# Altium PCB PCB_18_R2.PcbDoc (part 3 of 3)
Units mm, origin at the board's own origin, x right, y up, seen from the top; angles counter-clockwise.
Board outline 255 x 215.3 mm, 2 copper layers (Top Layer, Bottom Layer), stack 1.071 mm thick; 236 components, 0 nets, 1421 pads, 588 vias.
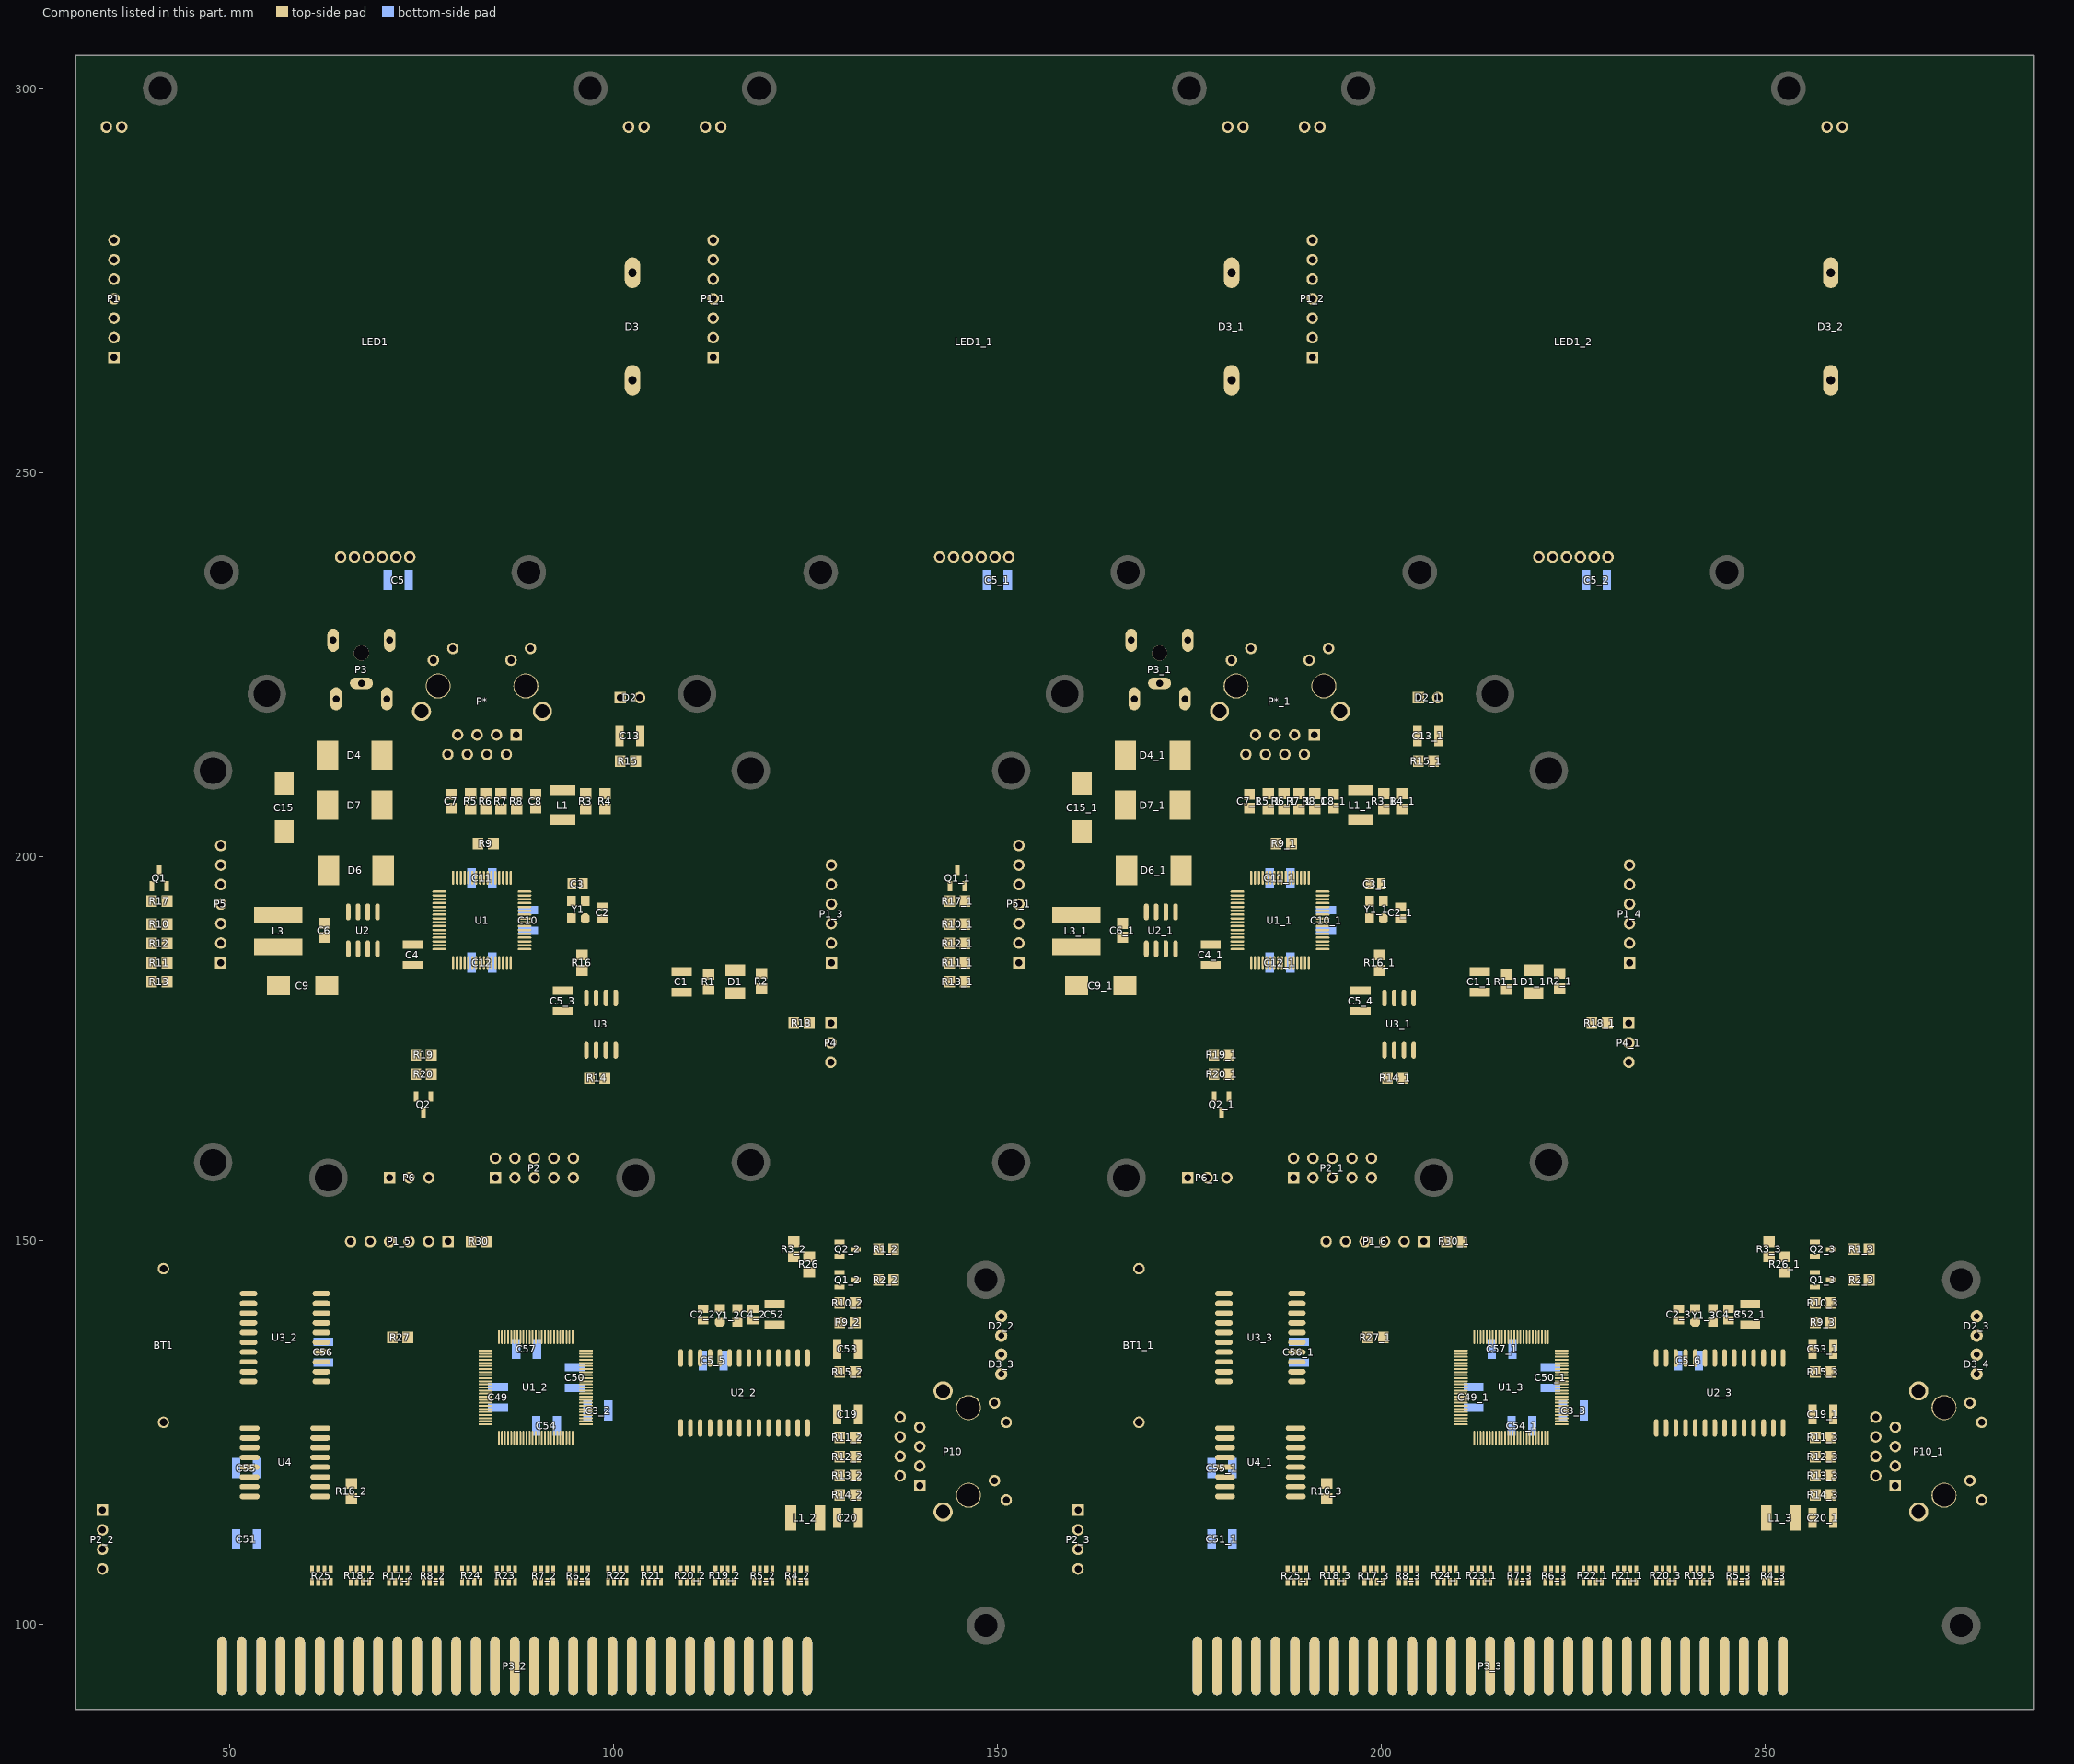
[diagram p3: the components of this part, seen from the top]

## Via types
v1: diameter 1.2, hole 0.6, Top Layer to Bottom Layer, 588 vias

## Nets (pads, with @x,y where several pads share a name; then routed paths per layer and width w, separated by ;. In a path a pad name is that pad's centre, name@x,y a point inside that pad or via, vN(x,y) a via of type N, cw(c..) or ccw(c..) an arc to the next point about the centre after c; other vN are vias at no path point) (continued)
copper on no net: (continued)
  Bottom Layer w0.254: 35,265 42,265 64.5,242.5 64.5,239 ; 35,270.08 42.12,270.08 68.1,244.1 68.1,239 ; 35,275.1 42.9,275.1 71.7,246.3 71.7,239 ; v1(45.9,186.2) 48.9,186.2 ; v1(45.9,191.28) 48.9,191.28 ; 56.68,94.64 56.7,94.66 56.7,100.6 60,103.9 v1(62.5,103.9) ; v1(57.5,108.4) 58.5,109.4 63.025,109.4 65.7,112.075 75.675,112.075 v1(77,113.4) ; v1(57.5,110.4) 62.979,110.4 65.229,112.65 73.25,112.65 v1(76,115.4) ; 59.22,94.64 59.22,101.32 60.3,102.4 v1(63.5,102.4) ; v1(59.5,108.4) 72.5,108.4 v1@73.8,109.7 ; v1(59.499,112.401) 63.625,116.525 71,116.525 76.375,121.9 v1(77,121.9) ; 61.74,94.68 61.74,99.14 65,102.4 v1(65,103.9) ; v1(62,111.4) 65.975,115.375 72,115.375 76.525,119.9 v1(77,119.9) ; v1(62,113.4) 64.575,115.975 71.5,115.975 76.425,120.9 v1(78.5,120.9) ; 64.28,94.68 64.28,100.68 v1(66,102.4) ; v1(66.498,114.398) 72,114.398 76.502,118.9 78.5,118.9 79,118.4 79,115.1 86.7,107.4 97.3,107.4 98,108.1 98,112.9 v1(95.25,115.65) v1@95.5,115.4 ; v1(66.5,110.9) 76.5,110.9 77.5,109.9 78.5,109.9 v1(79,109.4) ; 66.82,94.68 66.82,99.72 69.5,102.4 v1(70.5,102.4) ; v1@67.5,141.438 72.938,141.438 73.512,142.012 73.512,144.812 77.1,148.4 v1(89.5,148.4) ; 68.34,149.9 70.426,147.814 70.426,144.474 v1(72.5,142.4) ; 69.5,94.82 69.36,94.68 69.4,94.72 69.4,99.4 71.5,101.5 v1(71.5,103.9) ; 70.88,149.9 70.88,146.02 v1(72.6,144.4) ; 71.9,94.68 72,94.78 ; v1(71.9,175.7) 71.9,190.45 v1(73.4,191.95) ; 71.92,94.64 71.92,101.82 v1(72.5,102.4) ; v1@73.4,193.7 73.4,197.165 71.203,199.362 71.203,202.024 74.479,205.3 92.34,205.3 106.3,205.3 125.4,186.2 128.4,186.2 ; v1(73.5,103.9) 73.5,100.9 74.44,99.96 74.44,94.68 ; v1(74.4,200.7) 76.746,198.354 76.746,167.996 82.128,162.614 87.856,162.614 89.73,160.74 ; v1(75,102.4) 75,101.4 75.5,100.9 76.5,100.9 77,100.4 77,94.7 76.98,94.68 ; v1(75.4,202.2) 74.589,202.2 73.473,201.084 73.473,200.316 74.016,199.773 76.292,197.497 76.292,167.808 81.94,162.16 85.77,162.16 87.19,160.74 ; v1(76,103.9) 76,101.8 76.4,101.4 79,101.4 79.52,100.88 79.52,94.68 ; v1(76,127.5) 77,128.5 v1(77,131.4) ; v1(76.4,200.7) 76.4,202.7 75.9,203.2 74.947,203.2 73.019,201.272 73.019,200.128 73.828,199.319 75.838,197.309 75.838,167.62 75.838,167.484 82.522,160.8 84.9,160.8 ; v1(77,102.4) 80.8,102.4 82.1,101.1 82.1,94.72 82.06,94.68 ; v1(77,117.9) 77,115.764 87.064,105.7 113.8,105.7 116,107.9 v1(116,109.4) ; v1(77,135.9) 79.6,133.3 79.6,123.32 79.63,123.29 79.63,115.06 79.916,114.774 83.478,111.212 87.684,111.212 89.496,109.4 v1(90.5,109.4) ; v1(77,141.4) 77,139.995 78.838,138.157 80.538,136.457 80.538,115.436 83.587,112.387 92.513,112.387 v1(94,110.9) ; v1(77,143.4) 79,143.4 79.746,142.654 79.746,138.533 81.446,136.833 81.446,115.812 83.858,113.4 94.5,113.4 96,111.9 v1(96,110.9) ; v1(77.4,202.2) 77.4,203.3 76.88,203.82 74.925,203.82 72.565,201.46 72.565,199.94 73.64,198.865 75.384,197.121 75.384,167.296 84.48,158.2 84.65,158.2 ; v1(78,103.9) 82.8,103.9 84.7,102 84.7,94.78 84.6,94.68 ; v1(78,116.4) 78,115.406 87.068,106.338 113.438,106.338 115,107.9 v1(115,110.9) ; v1(78.4,200.7) 78.4,203.3 77.426,204.274 74.737,204.274 72.111,201.648 72.111,199.752 73.452,198.411 74.93,196.933 74.93,167.108 74.93,165.412 83.702,156.64 86.64,156.64 87.19,157.19 87.19,158.2 ; v1(78.5,136.9) 80.084,135.316 80.084,115.248 83.532,111.8 88.6,111.8 v1(89.5,110.9) ; v1(78.5,142.4) 78.5,139.137 80.992,136.645 80.992,115.624 83.716,112.9 93.5,112.9 95,111.4 v1(95,109.4) ; v1(78.5,144.4) 79.4,144.4 80.2,143.6 80.2,138.721 81.9,137.021 81.9,116 83.996,113.904 94.996,113.904 97,111.9 v1(97,109.4) ; 79.115,227.102 85.161,227.102 86.685,225.578 ; v1(79.4,202.2) 79.4,203.3 77.972,204.728 77.557,204.728 77.143,204.728 74.549,204.728 71.657,201.836 71.657,199.564 73.264,197.957 74.476,196.745 74.476,165.224 83.514,156.186 88.986,156.186 89.73,156.93 89.73,158.2 ; v1(81.4,181.7) 82.754,183.054 92.412,183.054 95.86,186.502 95.86,203.66 v1(96.4,204.2) ; 81.55,196.05 81.55,197.2 ; v1(83.4,181.7) 84.3,182.6 92.6,182.6 96.314,186.314 96.314,201.614 v1(98.9,204.2) ; v1(84.5,143.4) 85.946,141.954 93.646,141.954 94.473,141.127 94.486,141.127 94.537,141.076 98.524,141.076 102,137.6 v1(102,136.4) ; v1(85,149.9) 90,149.9 v1(91.5,148.4) ; v1(85.5,144.9) 85.5,143.025 86.117,142.408 93.834,142.408 94.661,141.581 94.674,141.581 94.725,141.53 98.712,141.53 102.842,137.4 v1(103.5,137.4) ; v1(85.9,194.7) v1(92.393,201.193) ; v1(86.5,143.4) 86.5,145.4 87,145.9 88.2,145.9 90.784,143.316 94.21,143.316 95.037,142.489 95.051,142.489 95.102,142.438 99.963,142.438 100.5,142.975 v1(100.5,144.9) ; 87.14,94.68 87.14,101.04 88.5,102.4 v1(89.5,102.4) ; v1(87.5,144.9) 89.538,142.862 94.022,142.862 94.849,142.035 94.863,142.035 94.914,141.984 98.9,141.984 101.984,138.9 104.2,138.9 104.8,138.3 104.8,136 104.2,135.4 v1(103.5,135.4) ; 87.55,190.35 88.9,190.35 ; 89.5,94.86 89.68,94.68 89.6,94.76 89.6,100.2 90.5,101.1 v1(90.5,103.9) ; v1(90.4,185.2) 94.4,189.2 v1(94.4,202.6) ; v1(91.5,102.4) 91.5,100.9 92.22,100.18 92.22,94.68 ; 92.27,158.2 93.4,159.33 93.4,180.4 99,186 99,199.8 v1(99.9,200.7) ; 92.27,160.74 92.27,180.155 98.419,186.304 98.419,200.181 v1@97.9,200.7 ; v1(92.5,103.9) 92.5,100.9 93,100.4 94.1,100.4 94.76,99.74 94.76,94.68 ; v1(94,102.4) 94,101.5 94.6,100.9 96.6,100.9 97.3,100.2 97.3,94.68 ; v1(94.9,171.2) 94.9,177.635 v1(96.499,179.234) ; v1(95,103.9) 95,101.9 95.5,101.4 99.3,101.4 99.84,100.86 99.84,94.68 ; v1(95.5,143.4) 95.5,145.9 97.3,147.7 106.2,147.7 v1(107,146.9) v1@106.673,147.227 ; v1(96,102.4) 101.4,102.4 102.5,101.3 102.5,94.8 102.38,94.68 ; v1(97,103.9) 103.5,103.9 105,102.4 105,94.76 104.92,94.68 ; v1(97.474,143.4) 97.5,143.4 97.5,145.561 98.709,146.77 103.13,146.77 108.186,141.714 108.186,118.586 105.604,116.004 105.604,114.796 106.5,113.9 v1(106.5,109.4) ; v1(98.5,144.9) 98.5,145.107 99.709,146.316 102.942,146.316 107.732,141.526 107.732,118.774 105,116.042 105,111.4 v1(105.5,110.9) ; v1(99.5,110.9) 99.5,114.394 105.008,119.902 105.008,132.692 104.3,133.4 v1(103.5,133.4) ; v1(99.5,143.4) 99.5,145.26 100.102,145.862 102.754,145.862 107.278,141.338 107.278,118.962 104.5,116.184 v1(104.5,109.4) ; v1(100.5,109.4) 100.5,114.752 105.462,119.714 105.462,133.438 104.5,134.4 v1(102,134.4) ; v1(101.5,110.9) 101.5,115.11 105.916,119.526 105.916,138.784 104.3,140.4 v1(102,140.4) ; v1(102,132.4) 104,132.4 104.554,131.846 104.554,123.688 ; v1(102,142.4) 105.3,142.4 106.824,140.876 106.824,119.15 103.5,115.826 v1(103.5,110.9) ; v1(102.5,109.4) 102.5,115.468 106.37,119.338 106.37,139.83 104.8,141.4 v1(103.5,141.4) ; 103.44,220.7 103.44,209.16 121.4,191.2 123.86,188.74 128.4,188.74 ; v1(103.5,131.4) 104.1,130.8 104.1,123.876 ; v1(106.7,115.3) 106.819,115.3 108.764,117.245 ccw(c102.587,123.423) v1(111.323,123.423) ; 107.46,94.68 107.46,100.56 108.6,101.7 117.2,101.7 118,102.5 v1(118,103.9) ; v1(108,145.4) 106.898,145.4 105.071,147.227 98.027,147.227 96.5,145.7 v1@96.5,145.132 ; v1@109.6,128.3 109.6,128.4 v1@109.6,128.7 ; 110,94.68 110,100.1 111.1,101.2 117.8,101.2 v1(119,102.4) ; v1(110.5,115.9) 110.5,115.54 113,113.04 v1(113,110.9) ; v1(112.5,115.9) 114,114.4 v1(114,109.4) ; 112.54,94.68 112.54,99.84 113.4,100.7 119,100.7 120,101.7 v1(120,103.9) ; 113,265 120,265 142.5,242.5 142.5,239 ; 113,270.08 120.12,270.08 146.1,244.1 146.1,239 ; 113,275.1 120.9,275.1 149.7,246.3 149.7,239 ; v1(114,121.9) 116.016,119.884 117.984,119.884 v1(119,120.9) ; 115.08,94.68 115.08,99.58 115.7,100.2 119.51,100.2 121,101.69 v1(121,102.4) ; v1@115.1,123.4 115.1,122.3 v1(116.5,120.9) ; 117.62,94.68 117.62,99.32 118.046,99.746 119.846,99.746 122,101.9 v1(122,103.9) ; 120.16,98.46 120.16,94.68 120.16,99.06 123,101.9 v1(123,102.4) ; 122.7,94.68 122.7,100 124.013,101.313 v1@124.013,103.8 ; 125.24,94.68 v1(125.24,102.4) ; v1@127.833,119.266 127.833,119.733 133.843,125.743 139.898,125.743 ; 132.88,114.574 133,114.694 ; v1(149.8,186.2) 152.8,186.2 ; v1(149.8,191.28) 152.8,191.28 ; 150.5,135.17 149.23,135.17 148.5,135.9 ; 150.5,140.17 148.5,138.17 148.5,135.9 ; v1(175.8,175.7) 175.8,190.45 v1(177.3,191.95) ; v1(177.299,193.699) 177.3,197.165 175.103,199.362 175.103,202.024 178.379,205.3 196.24,205.3 210.2,205.3 229.3,186.2 232.3,186.2 ; v1(178.3,200.7) 180.646,198.354 180.646,167.996 186.028,162.614 191.756,162.614 193.63,160.74 ; v1(179.3,202.2) 178.489,202.2 177.373,201.084 177.373,200.316 177.916,199.773 180.192,197.497 180.192,167.808 185.84,162.16 189.67,162.16 191.09,160.74 ; v1(180.3,200.7) 180.3,202.7 179.8,203.2 178.847,203.2 176.919,201.272 176.919,200.128 177.728,199.319 179.738,197.309 179.738,167.62 179.738,167.484 186.422,160.8 188.8,160.8 ; v1(181.3,202.2) 181.3,203.3 180.78,203.82 178.825,203.82 176.465,201.46 176.465,199.94 177.54,198.865 179.284,197.121 179.284,167.296 188.38,158.2 188.55,158.2 ; v1(182.3,200.7) 182.3,203.3 181.326,204.274 178.637,204.274 176.011,201.648 176.011,199.752 177.352,198.411 178.83,196.933 178.83,167.108 178.83,165.412 187.602,156.64 190.54,156.64 191.09,157.19 191.09,158.2 ; 183.015,227.102 189.061,227.102 190.585,225.578 ; v1(183.3,202.2) 183.3,203.3 181.872,204.728 181.457,204.728 181.043,204.728 178.449,204.728 175.557,201.836 175.557,199.564 177.164,197.957 178.376,196.745 178.376,165.224 187.414,156.186 192.886,156.186 193.63,156.93 193.63,158.2 ; 183.68,94.64 183.7,94.66 183.7,100.6 187,103.9 v1(189.5,103.9) ; v1(184.5,108.4) 185.5,109.4 190.025,109.4 192.7,112.075 202.675,112.075 v1(204,113.4) ; v1(184.5,110.4) 189.979,110.4 192.229,112.65 200.25,112.65 v1(203,115.4) ; v1(185.3,181.7) 186.654,183.054 196.312,183.054 199.76,186.502 199.76,203.66 v1(200.3,204.2) ; 185.45,196.05 185.45,197.2 ; 186.22,94.64 186.22,101.32 187.3,102.4 v1(190.5,102.4) ; v1(186.5,108.4) 199.5,108.4 v1@200.8,109.7 ; v1(186.499,112.401) 190.625,116.525 198,116.525 203.375,121.9 v1(204,121.9) ; v1(187.3,181.7) 188.2,182.6 196.5,182.6 200.214,186.314 200.214,201.614 v1(202.8,204.2) ; 188.74,94.68 188.74,99.14 192,102.4 v1(192,103.9) ; v1(189,111.4) 192.975,115.375 199,115.375 203.525,119.9 v1(204,119.9) ; v1(189,113.4) 191.575,115.975 198.5,115.975 203.425,120.9 v1(205.5,120.9) ; v1(189.8,194.7) v1(196.293,201.193) ; 191,265 198,265 220.5,242.5 220.5,239 ; 191,270.08 198.12,270.08 224.1,244.1 224.1,239 ; 191,275.1 198.9,275.1 227.7,246.3 227.7,239 ; 191.28,94.68 191.28,100.68 v1(193,102.4) ; 191.45,190.35 192.8,190.35 ; v1(193.498,114.398) 199,114.398 203.502,118.9 205.5,118.9 206,118.4 206,115.1 213.7,107.4 224.3,107.4 225,108.1 225,112.9 v1(222.25,115.65) v1@222.5,115.4 ; v1(193.5,110.9) 203.5,110.9 204.5,109.9 205.5,109.9 v1(206,109.4) ; 193.82,94.68 193.82,99.72 196.5,102.4 v1(197.5,102.4) ; v1(194.3,185.2) 198.3,189.2 v1(198.3,202.6) ; v1@194.5,141.438 199.938,141.438 200.512,142.012 200.512,144.812 204.1,148.4 v1(216.5,148.4) ; 195.34,149.9 197.426,147.814 197.426,144.474 v1(199.5,142.4) ; 196.17,158.2 197.3,159.33 197.3,180.4 202.9,186 202.9,199.8 v1(203.8,200.7) ; 196.17,160.74 196.17,180.155 202.319,186.304 202.319,200.181 v1@201.8,200.7 ; 196.5,94.82 196.36,94.68 196.4,94.72 196.4,99.4 198.5,101.5 v1(198.5,103.9) ; 197.88,149.9 197.88,146.02 v1(199.6,144.4) ; v1(198.8,171.2) 198.8,177.635 v1(200.399,179.234) ; 198.9,94.68 199,94.78 ; 198.92,94.64 198.92,101.82 v1(199.5,102.4) ; v1(200.5,103.9) 200.5,100.9 201.44,99.96 201.44,94.68 ; v1(202,102.4) 202,101.4 202.5,100.9 203.5,100.9 204,100.4 204,94.7 203.98,94.68 ; v1(203,103.9) 203,101.8 203.4,101.4 206,101.4 206.52,100.88 206.52,94.68 ; v1(203,127.5) 204,128.5 v1(204,131.4) ; v1(204,102.4) 207.8,102.4 209.1,101.1 209.1,94.72 209.06,94.68 ; v1(204,117.9) 204,115.764 214.064,105.7 240.8,105.7 243,107.9 v1(243,109.4) ; v1(204,135.9) 206.6,133.3 206.6,123.32 206.63,123.29 206.63,115.06 206.916,114.774 210.478,111.212 214.684,111.212 216.496,109.4 v1(217.5,109.4) ; v1(204,141.4) 204,139.995 205.838,138.157 207.538,136.457 207.538,115.436 210.587,112.387 219.513,112.387 v1(221,110.9) ; v1(204,143.4) 206,143.4 206.746,142.654 206.746,138.533 208.446,136.833 208.446,115.812 210.858,113.4 221.5,113.4 223,111.9 v1(223,110.9) ; v1(205,103.9) 209.8,103.9 211.7,102 211.7,94.78 211.6,94.68 ; v1(205,116.4) 205,115.406 214.068,106.338 240.438,106.338 242,107.9 v1(242,110.9) ; v1(205.5,136.9) 207.084,135.316 207.084,115.248 210.532,111.8 215.6,111.8 v1(216.5,110.9) ; v1(205.5,142.4) 205.5,139.137 207.992,136.645 207.992,115.624 210.716,112.9 220.5,112.9 222,111.4 v1(222,109.4) ; v1(205.5,144.4) 206.4,144.4 207.2,143.6 207.2,138.721 208.9,137.021 208.9,116 210.996,113.904 221.996,113.904 224,111.9 v1(224,109.4) ; 207.34,220.7 207.34,209.16 225.3,191.2 227.76,188.74 232.3,188.74 ; v1(211.5,143.4) 212.946,141.954 220.646,141.954 221.473,141.127 221.486,141.127 221.537,141.076 225.524,141.076 229,137.6 v1(229,136.4) ; v1(212,149.9) 217,149.9 v1(218.5,148.4) ; v1(212.5,144.9) 212.5,143.025 213.117,142.408 220.834,142.408 221.661,141.581 221.674,141.581 221.725,141.53 225.712,141.53 229.842,137.4 v1(230.5,137.4) ; v1(213.5,143.4) 213.5,145.4 214,145.9 215.2,145.9 217.784,143.316 221.21,143.316 222.037,142.489 222.051,142.489 222.102,142.438 226.963,142.438 227.5,142.975 v1(227.5,144.9) ; 214.14,94.68 214.14,101.04 215.5,102.4 v1(216.5,102.4) ; v1(214.5,144.9) 216.538,142.862 221.022,142.862 221.849,142.035 221.863,142.035 221.914,141.984 225.9,141.984 228.984,138.9 231.2,138.9 231.8,138.3 231.8,136 231.2,135.4 v1(230.5,135.4) ; 216.5,94.86 216.68,94.68 216.6,94.76 216.6,100.2 217.5,101.1 v1(217.5,103.9) ; v1(218.5,102.4) 218.5,100.9 219.22,100.18 219.22,94.68 ; v1(219.5,103.9) 219.5,100.9 220,100.4 221.1,100.4 221.76,99.74 221.76,94.68 ; v1(221,102.4) 221,101.5 221.6,100.9 223.6,100.9 224.3,100.2 224.3,94.68 ; v1(222,103.9) 222,101.9 222.5,101.4 226.3,101.4 226.84,100.86 226.84,94.68 ; v1(222.5,143.4) 222.5,145.9 224.3,147.7 233.2,147.7 v1(234,146.9) v1@233.673,147.227 ; v1(223,102.4) 228.4,102.4 229.5,101.3 229.5,94.8 229.38,94.68 ; v1(224,103.9) 230.5,103.9 232,102.4 232,94.76 231.92,94.68 ; v1(224.474,143.4) 224.5,143.4 224.5,145.561 225.709,146.77 230.13,146.77 235.186,141.714 235.186,118.586 232.604,116.004 232.604,114.796 233.5,113.9 v1(233.5,109.4) ; v1(225.5,144.9) 225.5,145.107 226.709,146.316 229.942,146.316 234.732,141.526 234.732,118.774 232,116.042 232,111.4 v1(232.5,110.9) ; v1(226.5,110.9) 226.5,114.394 232.008,119.902 232.008,132.692 231.3,133.4 v1(230.5,133.4) ; v1(226.5,143.4) 226.5,145.26 227.102,145.862 229.754,145.862 234.278,141.338 234.278,118.962 231.5,116.184 v1(231.5,109.4) ; v1(227.5,109.4) 227.5,114.752 232.462,119.714 232.462,133.438 231.5,134.4 v1(229,134.4) ; v1(228.5,110.9) 228.5,115.11 232.916,119.526 232.916,138.784 231.3,140.4 v1(229,140.4) ; v1(229,132.4) 231,132.4 231.554,131.846 231.554,123.688 ; v1(229,142.4) 232.3,142.4 233.824,140.876 233.824,119.15 230.5,115.826 v1(230.5,110.9) ; v1(229.5,109.4) 229.5,115.468 233.37,119.338 233.37,139.83 231.8,141.4 v1(230.5,141.4) ; v1(230.5,131.4) 231.1,130.8 231.1,123.876 ; v1(233.7,115.3) 233.819,115.3 235.764,117.245 ccw(c229.587,123.423) v1(238.323,123.423) ; 234.46,94.68 234.46,100.56 235.6,101.7 244.2,101.7 245,102.5 v1(245,103.9) ; v1(235,145.4) 233.898,145.4 232.071,147.227 225.027,147.227 223.5,145.7 v1@223.5,145.132 ; v1@236.6,128.3 236.6,128.4 v1@236.6,128.7 ; 237,94.68 237,100.1 238.1,101.2 244.8,101.2 v1(246,102.4) ; v1(237.5,115.9) 237.5,115.54 240,113.04 v1(240,110.9) ; v1(239.5,115.9) 241,114.4 v1(241,109.4) ; 239.54,94.68 239.54,99.84 240.4,100.7 246,100.7 247,101.7 v1(247,103.9) ; v1(241,121.9) 243.016,119.884 244.984,119.884 v1(246,120.9) ; 242.08,94.68 242.08,99.58 242.7,100.2 246.51,100.2 248,101.69 v1(248,102.4) ; v1@242.1,123.4 242.1,122.3 v1(243.5,120.9) ; 244.62,94.68 244.62,99.32 245.046,99.746 246.846,99.746 249,101.9 v1(249,103.9) ; 247.16,98.46 247.16,94.68 247.16,99.06 250,101.9 v1(250,102.4) ; 249.7,94.68 249.7,100 251.013,101.313 v1@251.013,103.8 ; 252.24,94.68 v1(252.24,102.4) ; v1@254.833,119.266 254.833,119.733 260.843,125.743 266.898,125.743 ; 259.88,114.574 260,114.694 ; 277.5,135.17 276.23,135.17 275.5,135.9 ; 277.5,140.17 275.5,138.17 275.5,135.9 ; v1@96.5,145.132 v1(96.5,144.9) v1@96.5,145.132 ; 148.5,135.9 v1(127.5,135.9) 148.5,135.9 ; v1@223.5,145.132 v1(223.5,144.9) v1@223.5,145.132 ; 275.5,135.9 v1(254.5,135.9) 275.5,135.9
  Bottom Layer w0.3: v1(68.9,174.2) v1(68.9,190.4) ; v1(70.4,169.7) v1(70.4,194.7) ; v1(172.8,174.2) v1(172.8,190.4) ; v1(174.3,169.7) v1(174.3,194.7)
  Bottom Layer w0.5: 54.14,120.4 v1(57,120.4) ; v1(73.4,179.7) 73.4,165.484 83.275,155.609 94.409,155.609 94.81,156.01 94.81,158.2 ; 87.35,133.55 v1(88,132.9) ; v1(109.5,128.4) 109.6,128.4 112.1,128.4 114.125,130.425 114.125,134.4 114.25,134.4 ; v1(125.3,119.4) v1@125.3,131.9 ; v1(177.3,179.7) 177.3,165.484 187.175,155.609 198.309,155.609 198.71,156.01 198.71,158.2 ; 181.14,120.4 v1(184,120.4) ; 214.35,133.55 v1(215,132.9) ; v1(236.5,128.4) 236.6,128.4 239.1,128.4 241.125,130.425 241.125,134.4 241.25,134.4 ; v1(252.3,119.4) v1@252.3,131.9
  Bottom Layer w1: 34,295 104,295 ; 35,267.54 42.46,267.54 66.3,243.7 66.3,236.6 66.9,236 70.65,236 ; 35,280.24 98.26,280.24 102.5,276 ; 49.04,94.68 49.04,102.4 50,103.36 50,144.7 57,151.7 73.42,151.7 ; 54.14,94.64 54.14,133.54 57.1,136.5 69.9,136.5 74.3,140.9 74.3,144.4 76.965,147.065 83.1,147.065 ; v1(57.5,106.4) 83,106.4 85.5,103.9 v1(88.5,103.9) ; v1(65.4,206.7) 65.4,167.8 73.44,159.76 73.44,158.2 ; 67.217,222.572 70.9,226.255 70.9,228.16 78.058,228.16 79.115,227.102 ; 69.9,239 69.9,245.3 42.58,272.62 35,272.62 33.63,272.62 33,273.25 33,277 33.7,277.7 35,277.7 86.8,277.7 102,262.5 102,261.5 ; 70.519,220.54 66.8,216.821 66.8,168.3 75.98,159.12 75.98,157.1 75.18,156.3 71.8,156.3 70.9,157.2 70.9,158.2 ; 73.42,149.9 73.42,151.71 108.915,151.71 111.5,149.125 v1(111.5,131.9) ; 73.5,236.15 73.5,239 ; v1(78.4,183.2) 78.4,190.2 v1(79.9,191.7) ; v1(78.5,123.4) 57.045,123.4 56.6,123.845 v1(56.6,132.9) 58,134.3 70.3,134.3 75.5,139.5 75.5,143.903 77.497,145.9 79.9,145.9 81.7,144.1 81.7,139.2 v1(88,132.9) 83.4,132.9 82.9,132.4 82.9,128.9 v1(82.9,121.9) ; v1(79.9,179.7) v1(79.9,188.7) 81.55,187.05 81.55,186.2 ; 81.55,196.05 v1(82.9,194.7) ; 82.95,128.25 87.35,128.25 v1(88,128.9) ; 84.25,186.2 84.25,187.35 v1(82.9,188.7) ; 84.25,197.2 84.25,196.35 v1(85.9,194.7) ; 85.15,130.9 v1(88,130.9) ; v1(85.9,188.7) 87.55,190.35 ; 87.35,133.55 87.35,135.9 ; v1@87.95,130.9 v1(92,130.9) 94.85,130.9 ; 88.9,193.05 87.25,193.05 v1(85.9,191.7) ; 89.95,125.9 90,125.95 v1(90,128.9) v1(90,132.9) 90,135.75 ; 90.05,135.9 90.05,136.95 86.072,140.928 85.084,140.928 83.1,142.912 83.1,147.065 ; v1(92,132.9) 92.65,133.55 95,133.55 ; 92.65,125.9 92.65,128.25 v1(92,128.9) 93,127.9 96.65,127.9 ; v1(96.499,179.234) 106.5,188.7 v1(116.1,188.7) ; 99.35,127.9 100,127.9 v1(101,128.9) ; v1(109.5,130.2) 109.5,147.5 108.495,148.505 96.03,148.505 94.59,147.065 83.1,147.065 ; 111.5,137.175 117.925,137.175 123.2,131.9 v1(123.5,131.9) ; 112,295 182,295 ; 113,267.54 120.46,267.54 144.3,243.7 144.3,236.6 144.9,236 148.65,236 ; 113,280.24 176.26,280.24 180.5,276 ; v1@117,137.2 v1(117,137.225) ; v1@127.55,143.95 v1(127.5,143.9) ; v1@127.55,147.95 v1(127.5,147.9) v1(127.5,143.9) ; v1(133.5,127) 133.548,127.048 v1(133.548,133.998) ; 139.898,123.203 138.628,123.203 137.358,121.933 134.056,118.631 134.056,114.694 125.206,114.694 123.5,116.4 v1(123.5,128.4) ; 142.946,130.442 139.39,133.998 ; 147.9,239 147.9,245.3 120.58,272.62 113,272.62 111.63,272.62 111,273.25 111,277 111.7,277.7 113,277.7 164.8,277.7 180,262.5 180,261.5 ; 151.5,236.15 151.5,239 ; v1(169.3,206.7) 169.3,167.8 177.34,159.76 177.34,158.2 ; 171.117,222.572 174.8,226.255 174.8,228.16 181.958,228.16 183.015,227.102 ; 174.419,220.54 170.7,216.821 170.7,168.3 179.88,159.12 179.88,157.1 179.08,156.3 175.7,156.3 174.8,157.2 174.8,158.2 ; 176.04,94.68 176.04,102.4 177,103.36 177,144.7 184,151.7 200.42,151.7 ; 181.14,94.64 181.14,133.54 184.1,136.5 196.9,136.5 201.3,140.9 201.3,144.4 203.965,147.065 210.1,147.065 ; v1(182.3,183.2) 182.3,190.2 v1(183.8,191.7) ; v1(183.8,179.7) v1(183.8,188.7) 185.45,187.05 185.45,186.2 ; v1(184.5,106.4) 210,106.4 212.5,103.9 v1(215.5,103.9) ; 185.45,196.05 v1(186.8,194.7) ; 188.15,186.2 188.15,187.35 v1(186.8,188.7) ; 188.15,197.2 188.15,196.35 v1(189.8,194.7) ; v1(189.8,188.7) 191.45,190.35 ; 190,295 260,295 ; 191,267.54 198.46,267.54 222.3,243.7 222.3,236.6 222.9,236 226.65,236 ; 191,280.24 254.26,280.24 258.5,276 ; 192.8,193.05 191.15,193.05 v1(189.8,191.7) ; v1(200.399,179.234) 210.4,188.7 v1(220,188.7) ; 200.42,149.9 200.42,151.71 235.915,151.71 238.5,149.125 v1(238.5,131.9) ; v1(205.5,123.4) 184.045,123.4 183.6,123.845 v1(183.6,132.9) 185,134.3 197.3,134.3 202.5,139.5 202.5,143.903 204.497,145.9 206.9,145.9 208.7,144.1 208.7,139.2 v1(215,132.9) 210.4,132.9 209.9,132.4 209.9,128.9 v1(209.9,121.9) ; 209.95,128.25 214.35,128.25 v1(215,128.9) ; 212.15,130.9 v1(215,130.9) ; 214.35,133.55 214.35,135.9 ; v1@214.95,130.9 v1(219,130.9) 221.85,130.9 ; 216.95,125.9 217,125.95 v1(217,128.9) v1(217,132.9) 217,135.75 ; 217.05,135.9 217.05,136.95 213.072,140.928 212.084,140.928 210.1,142.912 210.1,147.065 ; v1(219,132.9) 219.65,133.55 222,133.55 ; 219.65,125.9 219.65,128.25 v1(219,128.9) 220,127.9 223.65,127.9 ; 225.9,239 225.9,245.3 198.58,272.62 191,272.62 189.63,272.62 189,273.25 189,277 189.7,277.7 191,277.7 242.8,277.7 258,262.5 258,261.5 ; 226.35,127.9 227,127.9 v1(228,128.9) ; 229.5,236.15 229.5,239 ; v1(236.5,130.2) 236.5,147.5 235.495,148.505 223.03,148.505 221.59,147.065 210.1,147.065 ; 238.5,137.175 244.925,137.175 250.2,131.9 v1(250.5,131.9) ; v1@244,137.2 v1(244,137.225) ; v1@254.55,143.95 v1(254.5,143.9) ; v1@254.55,147.95 v1(254.5,147.9) v1(254.5,143.9) ; v1(260.5,127) 260.548,127.048 v1(260.548,133.998) ; 266.898,123.203 265.628,123.203 264.358,121.933 261.056,118.631 261.056,114.694 252.206,114.694 250.5,116.4 v1(250.5,128.4) ; 269.946,130.442 266.39,133.998 ; v1(79.9,191.7) v1(82.9,188.7) ; v1(79.9,191.7) v1(82.9,194.7) ; v1(82.9,188.7) v1(85.9,191.7) ; v1(82.9,194.7) v1(85.9,191.7) ; v1(123.5,128.4) v1(123.5,131.9) ; v1(123.5,128.4) v1(123.5,131.9) ; v1(123.5,131.9) 125.598,133.998 ; 125.598,133.998 v1(133.548,133.998) ; 125.598,133.998 v1(133.548,133.998) ; 125.598,133.998 125.598,141.998 ; 125.598,141.998 v1(127.5,143.9) ; 125.598,141.998 v1(127.5,143.9) ; v1(133.548,133.998) 139.39,133.998 ; v1(133.548,133.998) 139.39,133.998 ; v1(183.8,191.7) v1(186.8,188.7) ; v1(183.8,191.7) v1(186.8,194.7) ; v1(186.8,188.7) v1(189.8,191.7) ; v1(186.8,194.7) v1(189.8,191.7) ; v1(250.5,128.4) v1(250.5,131.9) ; v1(250.5,128.4) v1(250.5,131.9) ; v1(250.5,131.9) 252.598,133.998 ; 252.598,133.998 v1(260.548,133.998) ; 252.598,133.998 v1(260.548,133.998) ; 252.598,133.998 252.598,141.998 ; 252.598,141.998 v1(254.5,143.9) ; 252.598,141.998 v1(254.5,143.9) ; v1(260.548,133.998) 266.39,133.998 ; v1(260.548,133.998) 266.39,133.998
  other v1: 79,106.4 83.8,106.4 206,106.4 210.8,106.4 88.5,108.4 215.5,108.4 133.5,113.9 260.5,113.9 83.9,115.9 90,115.9 210.9,115.9 217,115.9 56.6,124.402 183.6,124.402 50,126.9 56.6,126.911 86,126.9 88,126.9 94,126.9 177,126.9 183.6,126.911 213,126.9 215,126.9 221,126.9 94,128.9 221,128.9 56.6,128.96 183.6,128.96 50,130.9 177,130.9 56.6,130.938 183.6,130.938 86,132.9 213,132.9 59.474,134.3 186.474,134.3 75.5,134.9 92,134.9 202.5,134.9 219,134.9 85.985,134.915 212.985,134.915 112.6,137.175 239.6,137.175 50,138 177,138 97.5,138.4 224.5,138.4 81.7,139.9 208.7,139.9 50,143.1 177,143.1 94.5,144.9 221.5,144.9 91,145.4 218,145.4 61.76,145.44 188.76,145.44 61.76,147.98 188.76,147.98 93.5,148.4 220.5,148.4 40.9,158.2 55.9,158.2 144.8,158.2 159.8,158.2 35.9,163.2 40.9,163.2 55.9,163.2 60.9,163.2 139.8,163.2 144.8,163.2 159.8,163.2 164.8,163.2 35.9,168.2 40.9,168.2 45.9,168.2 50.9,168.2 55.9,168.2 60.9,168.2 85.9,168.2 105.9,168.2 110.9,168.2 115.9,168.2 120.9,168.2 125.9,168.2 139.8,168.2 144.8,168.2 149.8,168.2 154.8,168.2 159.8,168.2 164.8,168.2 189.8,168.2 209.8,168.2 214.8,168.2 219.8,168.2 224.8,168.2 229.8,168.2 35.9,173.2 40.9,173.2 45.9,173.2 50.9,173.2 55.9,173.2 60.9,173.2 90.9,173.2 110.9,173.2 115.9,173.2 120.9,173.2 139.8,173.2 144.8,173.2 149.8,173.2 154.8,173.2 159.8,173.2 164.8,173.2 194.8,173.2 214.8,173.2 219.8,173.2 224.8,173.2 35.9,178.2 40.9,178.2 45.9,178.2 105.9,178.2 110.9,178.2 115.9,178.2 120.9,178.2 139.8,178.2 144.8,178.2 149.8,178.2 209.8,178.2 214.8,178.2 219.8,178.2 224.8,178.2 35.9,183.2 105.9,183.2 139.8,183.2 209.8,183.2 35.9,188.2 100.9,188.2 139.8,188.2 204.8,188.2 35.9,193.2 105.9,193.2 110.9,193.2 139.8,193.2 209.8,193.2 214.8,193.2 73.399,193.699 35.9,198.2 139.8,198.2 87.4,199.7 191.3,199.7 35.9,203.2 40.9,203.2 45.9,203.2 50.9,203.2 105.9,203.2 110.9,203.2 115.9,203.2 120.9,203.2 139.8,203.2 144.8,203.2 149.8,203.2 154.8,203.2 209.8,203.2 214.8,203.2 219.8,203.2 224.8,203.2 35.9,208.2 40.9,208.2 105.9,208.2 110.9,208.2 139.8,208.2 144.8,208.2 209.8,208.2 214.8,208.2 55.9,213.2 90.9,213.2 105.9,213.2 110.9,213.2 159.8,213.2 194.8,213.2 209.8,213.2 214.8,213.2

## Polygon pours and split planes (outlines as drawn)
no net on Top Layer "Bottom Layer-No Net" (solid, remove dead copper, pour order 1000): 283.967,152.857 283.967,90.787 156.967,90.787 156.967,152.857
no net on Top Layer "Bottom Layer-No Net" (solid, remove dead copper, pour order 1000): 156.967,152.857 156.967,90.787 29.967,90.787 29.967,152.857
no net on Top Layer "Top Layer-No Net" (solid, remove dead copper, pour order 1000): 40,304 30,294 30,232 108,232 108,294 98,304
no net on Top Layer "Top Layer-No Net" (solid, remove dead copper, pour order 1000): 118,304 108,294 108,232 186,232 186,294 176,304
no net on Top Layer "Top Layer-No Net" (solid, remove dead copper, pour order 1000): 196,304 186,294 186,232 264,232 264,294 254,304
no net on Top Layer "Top Layer-No Net 1" (solid, remove dead copper, pour order 1002): 33.398,158.374 cw(c33.611,158.507) 33.362,158.476 cw(c281.661,189.668) 32.296,210.702 cw(c32.546,210.681) 32.324,210.797 cw(c35.287,210.457) 35.287,213.44 cw(c35.287,213.189) 35.364,213.428 39.032,213.428 cw(c39.032,213.177) 39.095,213.42 ccw(c39.032,219.997) 45.61,219.997 45.61,224.2 cw(c48.615,224.368) 47.916,227.296 cw(c48.066,227.095) 48.022,227.341 cw(c82.96,31.135) 117.316,227.444 cw(c117.059,224.446) 120.069,224.446 cw(c117.059,224.446) 120.064,224.273 cw(c119.819,224.221) 120.069,224.221 120.069,221.072 cw(c119.823,221.027) 120.073,221.027 ccw(c127.72,221.027) 127.59,213.382 cw(c127.72,213.168) 127.72,213.418 130.285,213.418 cw(c130.486,210.46) 133.444,210.67 cw(c133.194,210.652) 133.444,210.652 cw(c133.194,210.652) 133.434,210.58 cw(c-116.024,190.672) 134.227,190.672 cw(c-116.024,190.672) 132.166,158.623 cw(c131.918,158.656) 132.129,158.521 cw(c125.899,159.218) 126.09,152.952 cw(c125.98,153.177) 125.98,152.927 39.619,152.927 cw(c39.619,153.177) 39.505,152.954 cw(c39.61,159.222)
no net on Top Layer "Top Layer-No Net" (solid, remove dead copper, pour order 1000): 65.9,191.2 65.9,200.7 52.9,200.7 52.9,191.2
no net on Top Layer "Top Layer-No Net 1" (solid, remove dead copper, pour order 1002): 137.298,158.374 cw(c137.511,158.507) 137.262,158.476 cw(c385.561,189.668) 136.196,210.702 cw(c136.446,210.681) 136.224,210.797 cw(c139.187,210.457) 139.187,213.44 cw(c139.187,213.189) 139.264,213.428 142.932,213.428 cw(c142.932,213.177) 142.995,213.42 ccw(c142.932,219.997) 149.51,219.997 149.51,224.2 cw(c152.515,224.368) 151.816,227.296 cw(c151.966,227.095) 151.922,227.341 cw(c186.86,31.135) 221.216,227.444 cw(c220.959,224.446) 223.969,224.446 cw(c220.959,224.446) 223.964,224.273 cw(c223.719,224.221) 223.969,224.221 223.969,221.072 cw(c223.723,221.027) 223.973,221.027 ccw(c231.62,221.027) 231.49,213.382 cw(c231.62,213.168) 231.62,213.418 234.185,213.418 cw(c234.386,210.46) 237.344,210.67 cw(c237.094,210.652) 237.344,210.652 cw(c237.094,210.652) 237.334,210.58 cw(c-12.124,190.672) 238.127,190.672 cw(c-12.124,190.672) 236.066,158.623 cw(c235.818,158.656) 236.029,158.521 cw(c229.799,159.218) 229.99,152.952 cw(c229.88,153.177) 229.88,152.927 143.519,152.927 cw(c143.519,153.177) 143.405,152.954 cw(c143.51,159.222)
no net on Top Layer "Top Layer-No Net" (solid, remove dead copper, pour order 1000): 169.8,191.2 169.8,200.7 156.8,200.7 156.8,191.2
no net on Bottom Layer "Bottom Layer-No Net" (solid, remove dead copper, pour order 1001): 156.969,90.789 283.969,90.789 283.969,152.859 156.969,152.859
no net on Bottom Layer "Bottom Layer-No Net" (solid, remove dead copper, pour order 1001): 29.969,90.789 156.969,90.789 156.969,152.859 29.969,152.859
no net on Bottom Layer "Top Layer-No Net" (solid, remove dead copper, pour order 1001): 40,304 30,294 30,232 108,232 108,294 98,304
no net on Bottom Layer "Top Layer-No Net" (solid, remove dead copper, pour order 1001): 118,304 108,294 108,232 186,232 186,294 176,304
no net on Bottom Layer "Top Layer-No Net" (solid, remove dead copper, pour order 1001): 196,304 186,294 186,232 264,232 264,294 254,304
no net on Bottom Layer "Bottom Layer-No Net" (solid, remove dead copper, pour order 1003): 33.445,158.399 cw(c33.657,158.532) 33.408,158.501 cw(c281.707,189.692) 32.343,210.727 cw(c32.592,210.706) 32.37,210.821 cw(c35.334,210.481) 35.334,213.465 cw(c35.334,213.214) 35.411,213.452 39.079,213.452 cw(c39.079,213.202) 39.141,213.445 ccw(c39.079,220.022) 45.656,220.022 45.656,224.224 cw(c48.661,224.393) 47.963,227.32 cw(c48.112,227.12) 48.068,227.366 cw(c83.007,31.159) 117.362,227.469 cw(c117.105,224.47) 120.115,224.47 cw(c117.105,224.47) 120.11,224.298 cw(c119.865,224.245) 120.116,224.245 120.116,221.097 cw(c119.869,221.052) 120.12,221.052 ccw(c127.766,221.052) 127.637,213.407 cw(c127.766,213.192) 127.766,213.443 130.332,213.443 cw(c130.533,210.485) 133.49,210.695 cw(c133.24,210.677) 133.491,210.677 cw(c133.24,210.677) 133.48,210.605 cw(c-115.977,190.697) 134.273,190.697 cw(c-115.977,190.697) 132.212,158.648 cw(c131.964,158.68) 132.175,158.546 cw(c125.945,159.243) 126.136,152.977 cw(c126.027,153.202) 126.027,152.952 39.665,152.952 cw(c39.665,153.202) 39.551,152.979 cw(c39.656,159.247)
no net on Bottom Layer "Bottom Layer-No Net" (solid, remove dead copper, pour order 1003): 137.345,158.399 cw(c137.557,158.532) 137.308,158.501 cw(c385.607,189.692) 136.243,210.727 cw(c136.492,210.706) 136.27,210.821 cw(c139.234,210.481) 139.234,213.465 cw(c139.234,213.214) 139.311,213.452 142.979,213.452 cw(c142.979,213.202) 143.041,213.445 ccw(c142.979,220.022) 149.556,220.022 149.556,224.224 cw(c152.561,224.393) 151.863,227.32 cw(c152.012,227.12) 151.968,227.366 cw(c186.907,31.159) 221.262,227.469 cw(c221.005,224.47) 224.015,224.47 cw(c221.005,224.47) 224.01,224.298 cw(c223.765,224.245) 224.016,224.245 224.016,221.097 cw(c223.769,221.052) 224.02,221.052 ccw(c231.666,221.052) 231.537,213.407 cw(c231.666,213.192) 231.666,213.443 234.232,213.443 cw(c234.433,210.485) 237.39,210.695 cw(c237.14,210.677) 237.391,210.677 cw(c237.14,210.677) 237.38,210.605 cw(c-12.077,190.697) 238.173,190.697 cw(c-12.077,190.697) 236.112,158.648 cw(c235.864,158.68) 236.075,158.546 cw(c229.845,159.243) 230.036,152.977 cw(c229.927,153.202) 229.927,152.952 143.565,152.952 cw(c143.565,153.202) 143.451,152.979 cw(c143.556,159.247)

## Keep-outs
Top Layer:
  circle w0.4: c222.9,136.9 r0.2
  circle w0.4: c189.425,130.05 r0.2
  circle w0.4: c189.251,115.151 r0.2
  circle w0.4: c95.9,136.9 r0.2
  circle w0.4: c62.425,130.05 r0.2
  circle w0.4: c62.251,115.151 r0.2
Keep-Out Layer:
  region: 170.5,99.085 170.5,91.1 170.98,91.1 170.98,99.085
  region: 257.36,99.085 257.36,91.2 258,91.2 258,99.085
  region: 43.5,99.085 43.5,91.1 43.98,91.1 43.98,99.085
  region: 130.36,99.085 130.36,91.2 131,91.2 131,99.085
  lines w0.254: 43,91.1 46.2,91.1 48.4,88.9 125.9,88.9 128.1,91.1 131.5,91.1 ; 170,91.1 173.2,91.1 175.4,88.9 252.9,88.9 255.1,91.1 259.5,91.1
  lines w0.5: 30.2,184.6 cw(c30.95,184.6) 31.7,184.6 ; 30.2,184.7 30.2,194.7 ccw(c30.95,194.7) 31.7,194.7 ; 32.577,210.705 ccw(c281.692,189.69) 33.642,158.53 ; 32.595,210.702 cw(c35.318,210.479) 35.318,213.212 ; 33.664,158.533 ccw(c39.641,159.245) 39.65,153.226 ; 35.318,213.2 39.064,213.2 ; 39.064,213.192 ccw(c39.064,220.02) 45.891,220.02 45.891,224.23 cw(c48.646,224.391) 48.115,227.098 ; 39.65,153.2 48.925,153.2 ; 43.98,91.1 30.3,91.1 30.3,152.6 156.7,152.6 156.7,91.1 130.34,91.1 ; 48.096,227.117 cw(c82.991,31.157) 117.315,227.218 cw(c117.09,224.468) 119.84,224.243 ; 48.9,153.2 116.9,153.2 ; 77.9,230.2 ccw(c77.9,230.95) 77.9,231.7 87.9,231.7 ccw(c87.9,230.95) 87.9,230.2 ; 116.875,153.2 126.012,153.2 ; 119.85,221.05 119.85,224.243 ; 119.854,221.05 ccw(c127.751,221.05) 127.751,213.153 ; 126.012,153.223 ccw(c125.93,159.241) 131.926,158.722 ; 127.751,213.19 130.325,213.19 cw(c130.517,210.483) 133.225,210.675 ; 131.949,158.677 ccw(c-115.993,190.695) 133.208,210.675 ; 134,184.7 cw(c134.75,184.7) 135.5,184.7 135.5,194.7 cw(c134.75,194.7) 134,194.7 ; 134.1,184.6 cw(c134.85,184.6) 135.6,184.6 ; 134.1,184.7 134.1,194.7 ccw(c134.85,194.7) 135.6,194.7 ; 136.477,210.705 ccw(c385.592,189.69) 137.542,158.53 ; 136.495,210.702 cw(c139.218,210.479) 139.218,213.212 ; 137.564,158.533 ccw(c143.541,159.245) 143.55,153.226 ; 139.218,213.2 142.964,213.2 ; 142.964,213.192 ccw(c142.964,220.02) 149.791,220.02 149.791,224.23 cw(c152.546,224.391) 152.015,227.098 ; 143.55,153.2 152.825,153.2 ; 151.996,227.117 cw(c186.891,31.157) 221.215,227.218 cw(c220.99,224.468) 223.74,224.243 ; 152.8,153.2 220.8,153.2 ; 170.98,91.1 157.3,91.1 157.3,152.6 283.7,152.6 283.7,91.1 257.34,91.1 ; 181.8,230.2 ccw(c181.8,230.95) 181.8,231.7 191.8,231.7 ccw(c191.8,230.95) 191.8,230.2 ; 220.775,153.2 229.912,153.2 ; 223.75,221.05 223.75,224.243 ; 223.754,221.05 ccw(c231.651,221.05) 231.651,213.153 ; 229.912,153.223 ccw(c229.83,159.241) 235.826,158.722 ; 231.651,213.19 234.225,213.19 cw(c234.417,210.483) 237.125,210.675 ; 235.849,158.677 ccw(c-12.093,190.695) 237.108,210.675 ; 237.9,184.7 cw(c238.65,184.7) 239.4,184.7 239.4,194.7 cw(c238.65,194.7) 237.9,194.7 ; 108,232 30,232 30,293.978 40.022,304 98,304 108,294 108,232 ; 108,232 108,293.978 118.022,304 176,304 186,294 186,232 ; 108,232 186,232 ; 186,232 186,293.978 196.022,304 254,304 264,294 264,232 186,232

## Silkscreen, mask and mechanical layers (free items; w line width, h text height)
Top Overlay:
  circle w0.254: c62.9,158.2 r3.5
  circle w0.254: c102.9,158.2 r3.5
  circle w0.254: c110.9,221.2 r3.5
  circle w0.254: c54.9,221.2 r3.5
  circle w0.254: c166.8,158.2 r3.5
  circle w0.254: c206.8,158.2 r3.5
  circle w0.254: c214.8,221.2 r3.5
  circle w0.254: c158.8,221.2 r3.5
  lines w0.254: 30.01,151.536 30.01,152.044 ; 30.792,90.424 31.3,88.9 ; 30.792,151.376 31.3,152.9 ; 31.046,88.9 31.554,88.9 ; 31.046,152.9 31.554,152.9 ; 31.3,115.796 31.3,88.9 ; 31.3,126.004 31.3,152.9 ; 31.534,151.282 30.01,151.79 ; 31.534,152.298 30.01,151.79 ; 31.808,90.424 31.3,88.9 ; 31.808,151.376 31.3,152.9 ; 87.771,151.79 30.01,151.79 ; 99.249,151.79 157.01,151.79 ; 155.486,151.282 157.01,151.79 ; 155.486,152.298 157.01,151.79 ; 157.792,90.424 158.3,88.9 ; 157.792,151.376 158.3,152.9 ; 158.046,88.9 158.554,88.9 ; 158.046,152.9 158.554,152.9 ; 158.3,115.796 158.3,88.9 ; 158.3,126.004 158.3,152.9 ; 158.534,151.282 157.01,151.79 ; 158.534,152.298 157.01,151.79 ; 158.808,90.424 158.3,88.9 ; 158.808,151.376 158.3,152.9 ; 214.771,151.79 157.01,151.79 ; 226.249,151.79 284.01,151.79 ; 282.486,151.282 284.01,151.79 ; 282.486,152.298 284.01,151.79 ; 284.01,151.536 284.01,152.044 ; 157.01,151.536 157.01,152.044 157.01,151.536
  text "127 (mm)" at 88.025,150.876 h1.52
  text "127 (mm)" at 215.025,150.876 h1.52
  text "64 (mm)" at 32.214,116.05 h1.52 r90
  text "64 (mm)" at 159.214,116.05 h1.52 r90

## Text inside footprints (layer, text, board x,y; h text height)
P2: Top Overlay "2" at 82.618,160.232 h1.27; Top Overlay "1" at 82.618,157.692 h1.27; Top Overlay "9" at 96.334,157.692 h1.27; Top Overlay "10" at 96.334,160.232 h1.27
P2_1: Top Overlay "2" at 186.518,160.232 h1.27; Top Overlay "1" at 186.518,157.692 h1.27; Top Overlay "9" at 200.234,157.692 h1.27; Top Overlay "10" at 200.234,160.232 h1.27